# EAGLE board CT_schematic (EAGLE 7.6.0)

Size 100 x 80 mm. Coordinates in mm from the lower left corner, seen from the top.
Outline: 0,0 100,0 100,80 0,80 0,0
Copper layers (1*16): Top 0.035mm / dielectric 1.5mm / Bottom 0.035mm
Design rules "default": minimum track width 10mil, minimum drill 24mil, track to track 8mil, track to pad 8mil, pad to pad 8mil, via to via 8mil, smd to smd 8mil, copper to edge 40mil, drill to drill 8mil, minimum pad ring 10mil, minimum via ring 8mil, stop-mask expansion 4mil, vias tented up to drill 0mil, thermal gap 10mil

## Footprints (pad centres in the part's own frame; a part is rotated, then mirrored left to right if it is on the bottom)
C0603 = smd 0.8 x 0.8: 1 -0.762,0; 2 0.762,0
C0402 = smd 0.5 x 0.5: 1 -0.508,0; 2 0.508,0
C0805 = smd 1.2 x 1.3: 1 -1.016,0; 2 1.016,0
C1206 = smd 1.3 x 1.6: 1 -1.524,0; 2 1.524,0
L0603 = smd 0.8 x 0.8: 1 -0.762,0; 2 0.762,0
DR1040 = smd 1.6 x 3.2: 1 -4.458,0; 2 4.458,0
R0603 = smd 0.8 x 0.8: 1 -0.762,0; 2 0.762,0
UFQFPN32 = smd 0.6 x 0.3: 1 -2.35,1.75; 2 -2.35,1.25; 3 -2.35,0.75; 4 -2.35,0.25; 5 -2.35,-0.25; 6 -2.35,-0.75; 7 -2.35,-1.25; 8 -2.35,-1.75; 17 2.35,-1.75; 18 2.35,-1.25; 19 2.35,-0.75; 20 2.35,-0.25; 21 2.35,0.25; 22 2.35,0.75; 23 2.35,1.25; 24 2.35,1.75 | smd 0.3 x 0.6: 9 -1.75,-2.35; 10 -1.25,-2.35; 11 -0.75,-2.35; 12 -0.25,-2.35; 13 0.25,-2.35; 14 0.75,-2.35; 15 1.25,-2.35; 16 1.75,-2.35; 25 1.75,2.35; 26 1.25,2.35; 27 0.75,2.35; 28 0.25,2.35; 29 -0.25,2.35; 30 -0.75,2.35; 31 -1.25,2.35; 32 -1.75,2.35 | smd 3.45 x 3.45: EPAD 0,0
SAMTEC_FTSH-105-01-L-DV-K = smd 0.762 x 2.794: 1 -2.54,-2.032; 2 -2.54,2.032; 3 -1.27,-2.032; 4 -1.27,2.032; 5 0,-2.032; 6 0,2.032; 7 1.27,-2.032; 8 1.27,2.032; 9 2.54,-2.032; 10 2.54,2.032
SSOP-28 = smd 1.5 x 0.4: 1 -3.625,4.225; 2 -3.625,3.575; 3 -3.625,2.925; 4 -3.625,2.275; 5 -3.625,1.625; 6 -3.625,0.975; 7 -3.625,0.325; 8 -3.625,-0.325; 9 -3.625,-0.975; 10 -3.625,-1.625; 11 -3.625,-2.275; 12 -3.625,-2.925; 13 -3.625,-3.575; 14 -3.625,-4.225; 15 3.625,-4.225; 16 3.625,-3.575; 17 3.625,-2.925; 18 3.625,-2.275; 19 3.625,-1.625; 20 3.625,-0.975; 21 3.625,-0.325; 22 3.625,0.325; 23 3.625,0.975; 24 3.625,1.625; 25 3.625,2.275; 26 3.625,2.925; 27 3.625,3.575; 28 3.625,4.225
HTSS-105-01-G-D = drill 1 pad 1.8 square: 1 0,0 | drill 1 pad 1.8: 2 0,2.54; 3 2.54,0; 4 2.54,2.54; 5 5.08,0; 6 5.08,2.54; 7 7.62,0; 8 7.62,2.54; 9 10.16,0; 10 10.16,2.54
ABS07-32.768KHZ-7-T = smd 1.1 x 2.4: 1 -2.5,0; 2 0,0
ASFL1 = smd 1.7 x 1.5: 1 -1.27,-1.1; 2 1.27,-1.1; 3 1.27,1.1; 4 -1.27,1.1
TSOT-23-5 = smd 1.3 x 0.62: 1 -1.31,0.95; 2 -1.31,0; 3 -1.31,-0.95; 4 1.31,-0.95; 5 1.31,0.95
DFN8_2X3MC = smd 0.813 x 0.305: 1 -1.398,0.75; 2 -1.398,0.25; 3 -1.398,-0.25; 4 -1.398,-0.75; 5 1.398,-0.75; 6 1.398,-0.25; 7 1.398,0.25; 8 1.398,0.75 | smd 1.753 x 1.549: 9 0,0
JST-2-SMD = smd 1 x 4.6: 1 -1,-3.7; 2 1,-3.7 | smd 1.6 x 3.4: NC1 -3.4,1.5; NC2 3.4,1.5
FCI_10118193-0001LF = smd 0.4 x 1.35: 1 -1.3,2.675; 2 -0.65,2.675; 3 0,2.675; 4 0.65,2.675; 5 1.3,2.675 | smd 1.6 x 1.4: 6 -3.2,2.45; 7 3.2,2.45 | smd 1.9 x 1.9: 8 -1.2,0; 9 1.2,0 | hole 0.5: -3.3,0; 3.3,0
SON-6 = smd 0.55 x 0.3: 1 -0.355,0.5 | smd 0.52 x 0.3: 2 -0.37,0; 3 -0.37,-0.5; 4 0.37,-0.5; 5 0.37,0; 6 0.37,0.5
SW_4-1437565-2 = smd 1.4 x 2.1: 1 -2.23,4.55; 2 -2.23,-4.55; 3 2.23,4.55; 4 2.23,-4.55
LGM67K-G1J2-24-Z = smd 0.8 x 1.4: A -2,0; C 0,0
NC7SZ125M5X = smd 1.3 x 0.7: 1 -1.3,0.95; 2 -1.3,0; 3 -1.3,-0.95; 4 1.3,-0.95; 5 1.3,0.95

## Placement (x,y rotation side)
C1  1e-07  [C0603]  -15.24,60.96 0 top  (outside the outline)
C2  1e-07  [C0603]  -19.05,60.96 0 top  (outside the outline)
C3  1e-07  [C0603]  -22.86,60.96 0 top  (outside the outline)
C4  1e-07  [C0603]  -26.67,60.96 0 top  (outside the outline)
C5  4.7e-06  [C0603]  -64.77,55.88 0 top  (outside the outline)
C6  1e-08  [C0603]  -30.48,60.96 0 top  (outside the outline)
C7  1e-06  [C0603]  -34.29,60.96 0 top  (outside the outline)
C8  1e-11  [C0402]  -64.77,60.96 0 top  (outside the outline)
C9  1e-11  [C0402]  -15.24,66.04 0 top  (outside the outline)
C10  1e-07  [C0402]  -19.05,66.04 0 top  (outside the outline)
C11  1e-07  [C0402]  -22.86,66.04 0 top  (outside the outline)
C12  1e-07  [C0402]  -26.67,66.04 0 top  (outside the outline)
C13  1e-07  [C0402]  -30.48,66.04 0 top  (outside the outline)
C14  1e-07  [C0402]  -34.29,66.04 0 top  (outside the outline)
C15  1e-07  [C0402]  -38.1,66.04 0 top  (outside the outline)
C16  1e-08  [C0402]  -41.91,66.04 0 top  (outside the outline)
C17  1e-05  [C0805]  -34.29,49.53 0 top  (outside the outline)
C18  1e-05  [C0805]  -39.37,49.53 0 top  (outside the outline)
C19  1e-07  [C0402]  -45.72,66.04 0 top  (outside the outline)
C20  1e-05  [C1206]  -59.69,40.64 0 top  (outside the outline)
C21  1e-05  [C1206]  -16.51,50.8 0 top  (outside the outline)
C22  1e-08  [C0402]  -49.53,66.04 0 top  (outside the outline)
C23  1e-08  [C0402]  -53.34,66.04 0 top  (outside the outline)
F1  240.0  [L0603]  -38.1,60.96 0 top  (outside the outline)
I1  5.2e-06  [DR1040]  -38.1,21.59 0 top  (outside the outline)
R1  10000.0  [R0603]  -25.4,55.88 0 top  (outside the outline)
R2  1000.0  [R0603]  -41.91,60.96 0 top  (outside the outline)
R3  1600.5  [R0603]  -45.72,60.96 0 top  (outside the outline)
R4  4700.0  [R0603]  -49.53,60.96 0 top  (outside the outline)
R5  10000.0  [R0603]  -30.48,55.88 0 top  (outside the outline)
R6  10000.0  [R0603]  -35.56,55.88 0 top  (outside the outline)
R7  10000.0  [R0603]  -40.64,55.88 0 top  (outside the outline)
R8  10000.0  [R0603]  -45.72,55.88 0 top  (outside the outline)
R9  5.0  [R0603]  -53.34,60.96 0 top  (outside the outline)
R10  100000.0  [R0603]  -57.15,49.53 0 top  (outside the outline)
R11  220000.0  [R0603]  -62.23,49.53 0 top  (outside the outline)
R12  1000000.0  [R0603]  -52.07,49.53 0 top  (outside the outline)
R13  10000.0  [R0603]  -50.8,55.88 0 top  (outside the outline)
R14  10000.0  [R0603]  -55.88,55.88 0 top  (outside the outline)
R15  9100.0  [R0603]  -57.15,60.96 0 top  (outside the outline)
R16  680000.0  [R0603]  -15.24,55.88 0 top  (outside the outline)
R17  120000.0  [R0603]  -20.32,55.88 0 top  (outside the outline)
R18  2000.0  [R0603]  -60.96,60.96 0 top  (outside the outline)
R19  10000.0  [R0603]  -60.96,55.88 0 top  (outside the outline)
U1  stm32l041K6U7  [UFQFPN32]  -24.13,33.02 0 top  (outside the outline)
U2  FTSH-105-01-L-DV-K  [SAMTEC_FTSH-105-01-L-DV-K]  -48.26,7.62 0 top  (outside the outline)
U3  ST3241EBPR  [SSOP-28]  -19.05,7.62 0 top  (outside the outline)
U4  HTSS-105-01-G-D  [HTSS-105-01-G-D]  -43.18,31.75 0 top  (outside the outline)
U5  ABS07-32.768KHZ-7-T  [ABS07-32.768KHZ-7-T]  -39.37,41.91 0 top  (outside the outline)
U6  ASFL1-12MHZ-NCS  [ASFL1]  -59.69,31.75 0 top  (outside the outline)
U7  ltc3406es5  [TSOT-23-5]  -44.45,49.53 0 top  (outside the outline)
U8  MCP73831T-2ACI/MC  [DFN8_2X3MC]  -62.23,64.77 0 top  (outside the outline)
U9  S2B-PH-SM4-TB(LF)(SN)  [JST-2-SMD]  -53.34,21.59 0 top  (outside the outline)
U10  10118193-0001LF  [FCI_10118193-0001LF]  -19.05,41.91 0 top  (outside the outline)
U11  TPS3895ADRYR  [SON-6]  -55.88,64.77 0 top  (outside the outline)
U12  4-1437565-2  [SW_4-1437565-2]  -27.94,21.59 0 top  (outside the outline)
U13  Q65110A2395  [LGM67K-G1J2-24-Z]  -48.26,41.91 0 top  (outside the outline)
U14  nc7sz125m5x  [NC7SZ125M5X]  -21.59,49.53 0 top  (outside the outline)
U15  nc7sz125m5x  [NC7SZ125M5X]  -27.94,49.53 0 top  (outside the outline)

## Library data of the parts
C1-C23 F1 I1 R1-R19 U1-U15 = circuit_tree

## Nets
CLK_CRYSTAL_U1_2: C8.1 U1.2 U5.1
CLK_CRYSTAL_U1_3: C9.1 U1.3 U5.2
CLK_U1_6: U1.6 U6.3
GND: C1.2 C2.2 C3.2 C4.2 C5.2 C6.2 C7.2 C8.2 C9.2 C10.2 C11.2 C14.2 C15.2 C16.2 C17.2 C18.1 C18.2 C19.2 C20.2 C21.2 C22.2 C23.2 R2.2 R5.2 R9.2 R11.2 R15.2 R17.2 R18.2 U1.EPAD U2.3 U2.5 U3.23 U3.25 U4.9 U6.2 U7.2 U8.6 U8.9 U9.2 U10.5 U10.6 U10.7 U10.8 U10.9 U11.2 U13.C U14.2 U14.3 U15.1 U15.3
INPUT_USBPOWER_5V: C20.1 R19.2 U8.1 U8.2 U10.1
NET_U1_4: R4.1 U1.4 U15.4
NET_U1_5: C6.1 C7.1 F1.1 U1.5
NET_U1_30: R3.1 U1.30 U13.A
NET_U1_31: R5.1 U1.31
NET_U1_32: R1.1 U1.32 U12.3 U12.4
NET_U2_9: R9.1 U2.9
NET_U3_1: C13.1 U3.1
NET_U3_2: C13.2 U3.2
NET_U3_3: C15.1 U3.3
NET_U3_22: R10.1 U3.22
NET_U3_24: C12.2 U3.24
NET_U3_27: C14.1 U3.27
NET_U3_28: C12.1 U3.28
NET_U4_3: U3.4 U4.3
NET_U4_4: U3.5 U4.4
NET_U4_5: U3.9 U4.5
NET_U4_6: U3.10 U4.6
NET_U7_1: U7.1
NET_U7_3: I1.1 U7.3
NET_U7_5: R11.1 R12.1 U7.5
NET_U7_ATNET_3: I1.2 R12.2
NET_U8_5: R19.1 U8.5
NET_U8_8: R18.1 U8.8
NET_U11_1: R14.1 R15.1 U11.1
NET_U11_3: R16.2 R17.1 U11.3
NET_U11_4: R13.1 U11.4 U14.4 U15.2
NET_U12_1: R2.1 U12.1 U12.2
PROC_LPUART1_CTS: U1.12 U3.13
PROC_LPUART1_RTS: U1.15 U3.18
PROC_LPUART1_RX: U1.9 U3.19
PROC_LPUART1_TX: U1.8 U3.14
PROC_SYS_SWCLK: R7.1 U1.24 U2.4
PROC_SYS_SWDIO: R8.1 U1.23 U2.2
RST_OUT_U2_JTAG_RST_B: R6.1 U2.10 U14.1
VCC_S1_3V7: C17.1 C21.1 U7.4 U8.3 U8.4 U9.1
VCC_TIER1_3V3: C1.1 C2.1 C3.1 C4.1 C5.1 C10.1 C11.1 C16.1 C18.2 C19.1 C22.1 C23.1 F1.2 I1.2 R1.2 R3.2 R4.2 R6.2 R7.2 R8.2 R10.2 R12.2 R13.2 R14.2 R16.1 U1.1 U1.17 U2.1 U3.26 U6.4 U11.6 U14.5 U15.5

## Tracks (layer width: path | path; a pad name or v marks a point on that pad's centre or on a via)
CLK_CRYSTAL_U1_2  (2 unrouted)
CLK_CRYSTAL_U1_3  (2 unrouted)
CLK_U1_6  (1 unrouted)
GND  (50 unrouted)
INPUT_USBPOWER_5V  (4 unrouted)
NET_U1_4  (2 unrouted)
NET_U1_5  (3 unrouted)
NET_U1_30  (2 unrouted)
NET_U1_31  (1 unrouted)
NET_U1_32  (3 unrouted)
NET_U2_9  (1 unrouted)
NET_U3_1  (1 unrouted)
NET_U3_2  (1 unrouted)
NET_U3_3  (1 unrouted)
NET_U3_22  (1 unrouted)
NET_U3_24  (1 unrouted)
NET_U3_27  (1 unrouted)
NET_U3_28  (1 unrouted)
NET_U4_3  (1 unrouted)
NET_U4_4  (1 unrouted)
NET_U4_5  (1 unrouted)
NET_U4_6  (1 unrouted)
NET_U7_3  (1 unrouted)
NET_U7_5  (2 unrouted)
NET_U7_ATNET_3  (1 unrouted)
NET_U8_5  (1 unrouted)
NET_U8_8  (1 unrouted)
NET_U11_1  (2 unrouted)
NET_U11_3  (2 unrouted)
NET_U11_4  (3 unrouted)
NET_U12_1  (2 unrouted)
PROC_LPUART1_CTS  (1 unrouted)
PROC_LPUART1_RTS  (1 unrouted)
PROC_LPUART1_RX  (1 unrouted)
PROC_LPUART1_TX  (1 unrouted)
PROC_SYS_SWCLK  (2 unrouted)
PROC_SYS_SWDIO  (2 unrouted)
RST_OUT_U2_JTAG_RST_B  (2 unrouted)
VCC_S1_3V7  (5 unrouted)
VCC_TIER1_3V3  (32 unrouted)